# EAGLE board New Day4 (EAGLE 7.5.0)
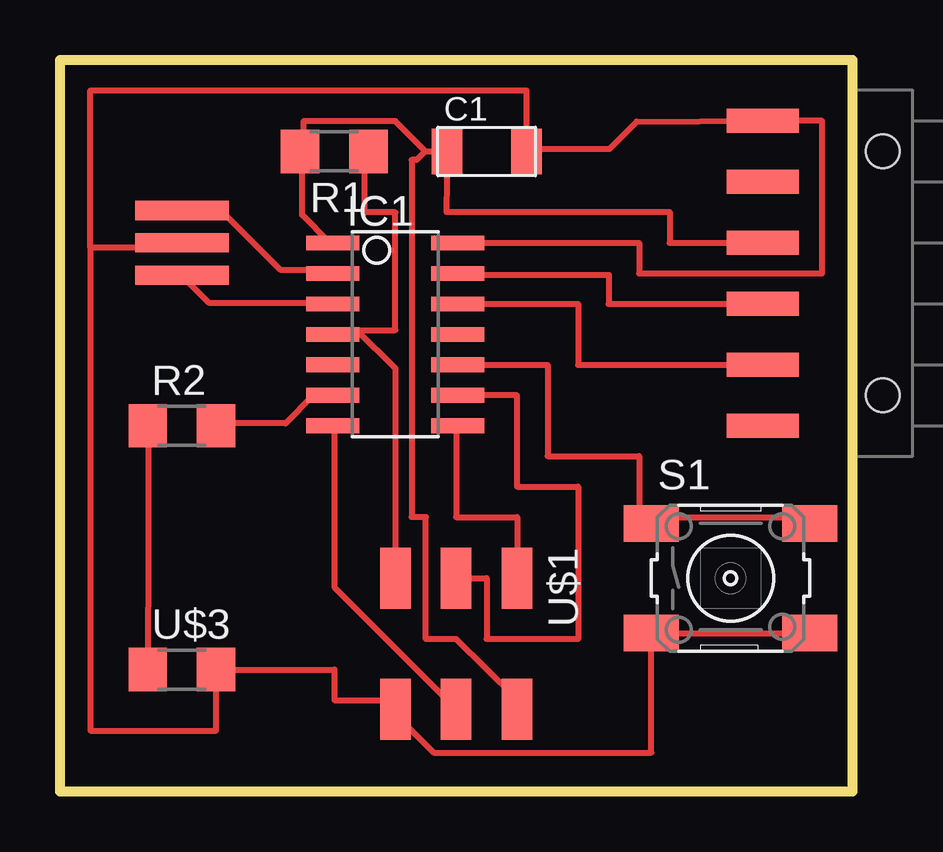
[diagram p0: board, top side]

Size 33.02 x 30.48 mm. Coordinates in mm from the lower left corner, seen from the top.
Outline: 33.02,30.48 33.02,0 0,0 0,30.48 33.02,30.48
Copper layers (1*16): Top 0.035mm / dielectric 1.5mm / Bottom 0.035mm
Design rules "default": minimum track width 10mil, minimum drill 24mil, track to track 8mil, track to pad 8mil, pad to pad 8mil, via to via 8mil, smd to smd 8mil, copper to edge 40mil, drill to drill 8mil, minimum pad ring 10mil, minimum via ring 8mil, stop-mask expansion 4mil, vias tented up to drill 0mil, thermal gap 10mil

## Footprints (pad centres in the part's own frame; a part is rotated, then mirrored left to right if it is on the bottom)
C1206FAB = smd 1.27 x 1.905: 1 -1.651,0; 2 1.651,0
SOIC14 = smd 0.61 x 2.21: 1 -3.81,-2.603; 2 -2.54,-2.603; 3 -1.27,-2.603; 4 0,-2.603; 5 1.27,-2.603; 6 2.54,-2.603; 7 3.81,-2.603; 8 3.81,2.603; 9 2.54,2.603; 10 1.27,2.603; 11 0,2.603; 12 -1.27,2.603; 13 -2.54,2.603; 14 -3.81,2.603
1X06-SMD = smd 1 x 3: 1 -6.35,5; 2 -3.81,5; 3 -1.27,5; 4 1.27,5; 5 3.81,5; 6 6.35,5 | hole 1.4: -5.08,0; 5.08,0
R1206 = smd 1.6 x 1.803: 1 -1.422,0; 2 1.422,0
6MM_SWITCH = smd 2.286 x 1.524: 1 -3.302,2.286; 2 3.302,2.286; 3 -3.302,-2.286; 4 3.302,-2.286
2X03SMD = smd 2.54 x 1.27: 1 -2.54,2.54; 2 2.92,2.54; 3 -2.54,0; 4 2.92,0; 5 -2.54,-2.54; 6 2.92,-2.54
EFOBM = smd 0.8 x 3.9: 1 -1.35,0; 2 0,0; 3 1.35,0
LED1206 = smd 1.6 x 1.803: 1 -1.422,0; 2 1.422,0

## Placement (x,y rotation side)
C1  1UF  [C1206FAB]  17.78,26.67 0 top
IC1  ATTINY44-SSU  [SOIC14]  13.97,19.05 270 top
JP1  [1X06-SMD]  34.29,21.59 90 top
R1  10k  [R1206]  11.43,26.67 180 top
R2  499  [R1206]  5.08,15.24 0 top
S1  [6MM_SWITCH]  27.94,8.89 0 top
U$1  AVRISPSMD  [2X03SMD]  16.51,6.35 270 top
U$2  RESONATOR  [EFOBM]  5.08,22.86 270 top
U$3  LED  [LED1206]  5.08,5.08 0 top

## Library data of the parts
C1 IC1 R1 R2 S1 U$1-U$3 = fab
JP1 = SparkFun

## Nets
BUTTON: IC1.10 S1.1 S1.2
CTS: JP1.5
GND: C1.2 IC1.14 JP1.6 S1.3 S1.4 U$1.6 U$2.2 U$3.2
LED: IC1.6 R2.2
MISO: IC1.8 U$1.1
MOSI: IC1.7 U$1.4
N$2: IC1.2 U$2.1
N$3: R2.1 U$3.1
N$4: IC1.3 U$2.3
RST: IC1.4 R1.1 U$1.5
RTS: JP1.1
RX: IC1.12 JP1.2
SCK: IC1.9 U$1.3
TX: IC1.13 JP1.3
VCC: C1.1 IC1.1 JP1.4 R1.2 U$1.2

## Tracks (layer width: path | path; a pad name or v marks a point on that pad's centre or on a via)
BUTTON
  Top 0.254: IC1.10 20.32,17.78 20.32,13.97 24.13,13.97 24.13,11.43 24.64,11.43 | 24.64,11.43 31.24,11.43 S1.2 | 24.64,11.43 S1.1
GND
  Top 0.254: 13.97,3.45 U$1.6 | 3.23,22.66 5.05,22.66 U$2.2 3.23,22.66 | U$1.6 13.97,3.23 15.57,1.63 24.64,1.63 S1.3 S1.4 | U$1.6 13.97,3.81 11.43,3.81 11.43,5.08 U$3.2 6.5,2.54 1.27,2.54 1.27,22.66 | 3.23,22.66 1.27,22.66 | 1.27,22.66 1.27,29.21 19.43,29.21 C1.2 19.46,26.77 22.88,26.77 24.03,27.91 JP1.6 31.75,27.94 31.75,21.59 24.13,21.59 24.13,22.86 IC1.14
LED
  Top 0.254: R2.2 6.65,15.34 9.4,15.34 10.54,16.48 11.23,16.48 IC1.6
MISO
  Top 0.254: IC1.8 16.51,15.24 16.51,11.43 19.05,11.43 U$1.1
MOSI
  Top 0.254: IC1.7 11.45,15.11 11.45,8.48 16.48,3.45 U$1.4
N$2
  Top 0.254: IC1.2 11.23,21.74 9.17,21.74 6.88,24.03 5.28,24.03 U$2.1
N$3
  Top 0.254: U$3.1 3.68,10.31 3.68,15.11 R2.1
N$4
  Top 0.254: IC1.3 11.23,20.37 6.2,20.37 5.28,21.28 U$2.3
RST
  Top 0.254: 12.37,19.23 11.45,19.23 IC1.4 12.37,19.23 | 12.83,26.54 R1.1 12.7,26.67 12.7,24.13 13.97,24.13 13.97,19.23 12.37,19.23 | U$1.5 13.97,17.63 12.37,19.23
RX
  Top 0.254: IC1.12 21.59,20.32 21.59,17.78 JP1.2
SCK
  Top 0.254: U$1.3 17.78,8.89 17.78,6.35 21.59,6.35 21.59,12.7 19.05,12.7 19.05,16.51 IC1.9
TX
  Top 0.254: 22.86,21.51 16.71,21.51 IC1.13 | 22.88,21.51 22.86,21.51 | 22.86,21.51 22.86,20.32 JP1.3
VCC
  Top 0.254: IC1.1 11.23,22.88 10.08,24.03 10.08,26.54 R1.2 10.08,26.77 10.16,26.77 10.16,27.94 13.95,27.94 | 16.03,26.77 C1.1 | U$1.2 19,3.45 19,3.91 16.51,6.35 15.24,6.35 15.24,11.43 14.66,11.43 14.66,26.31 14.86,26.31 15.21,26.67 | C1.1 16.1,24.16 25.4,24.16 25.4,22.86 JP1.4 | 13.95,27.94 13.97,27.94 | 13.95,27.94 15.21,26.67 | 15.21,26.67 C1.1